# Altium PCB MB.PcbDoc
Units mil, origin at the board's own origin, x right, y up, seen from the top; angles counter-clockwise.
Board outline 5314.96 x 4527.56 mil, 2 copper layers (Top Layer, Bottom Layer); 58 components, 60 nets, 335 pads, 6 vias.
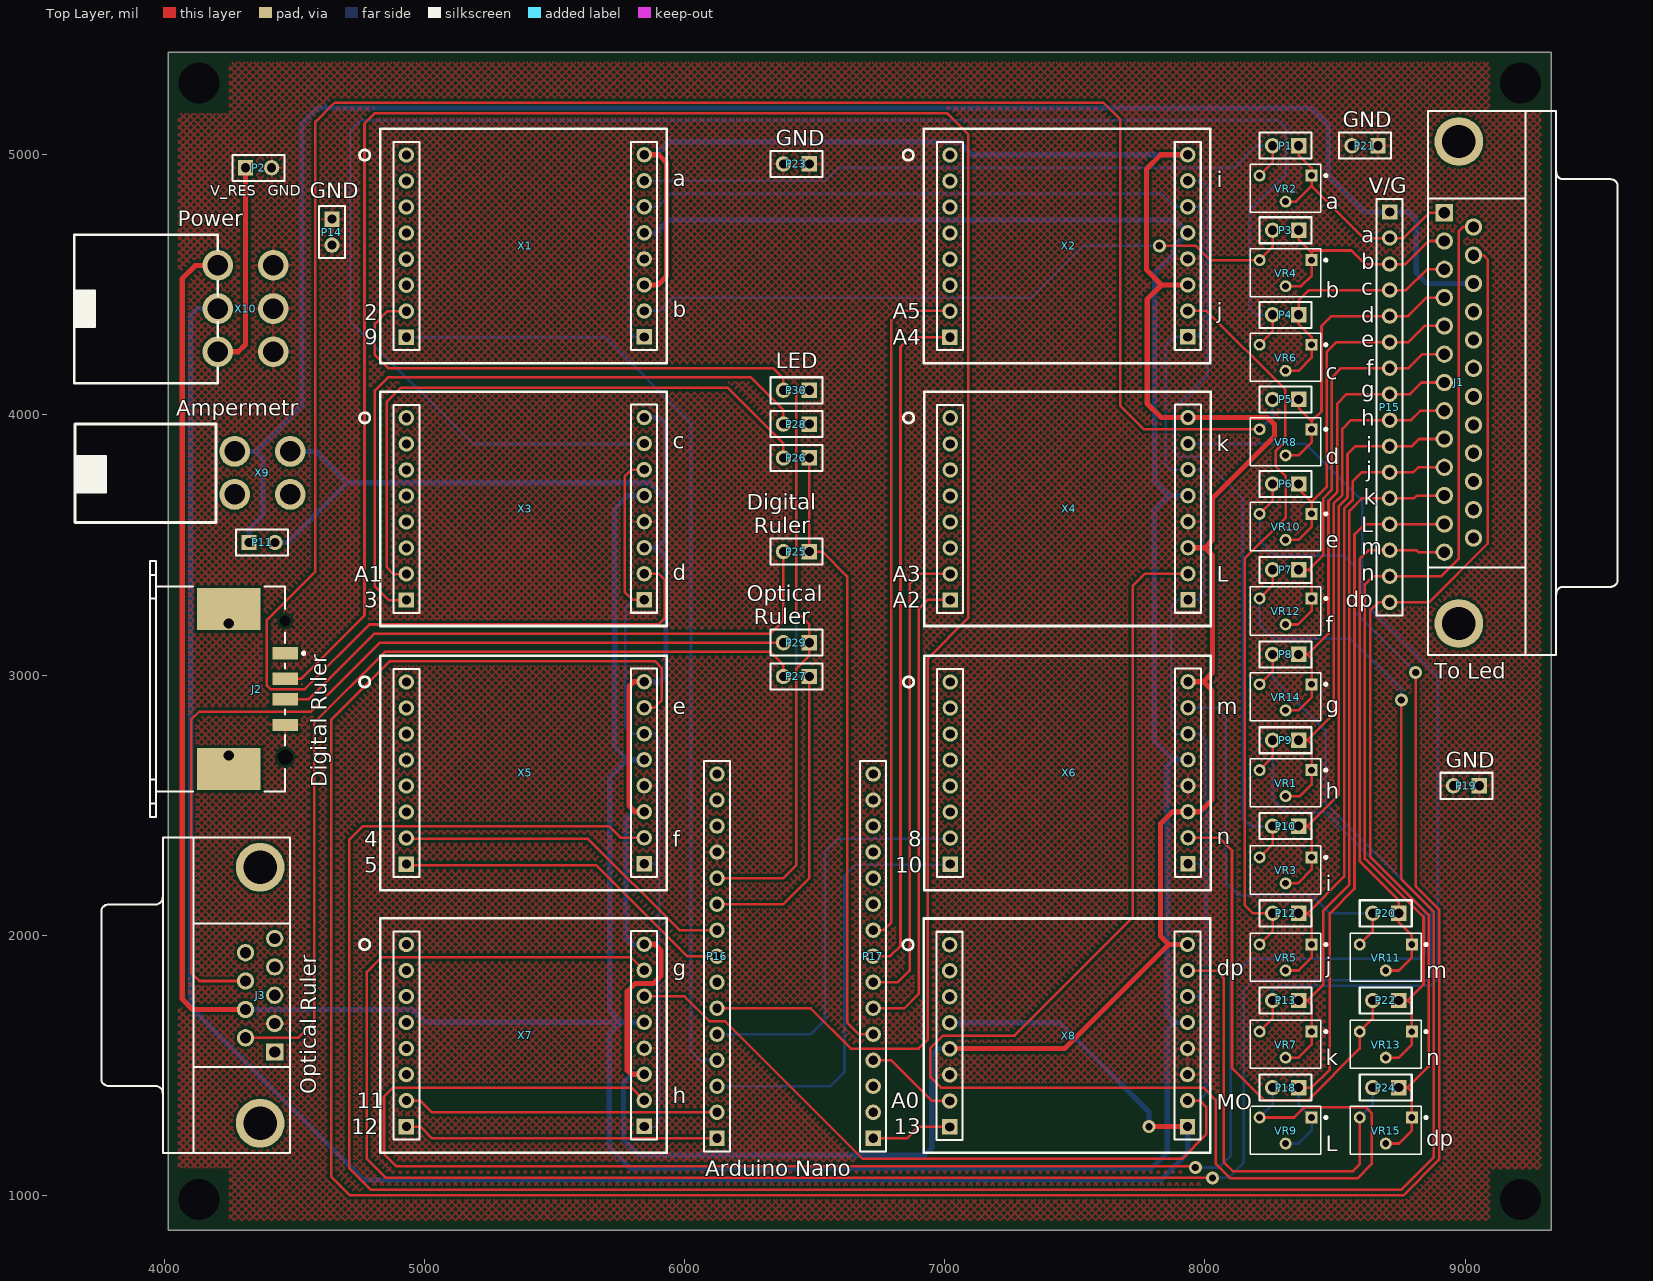
[diagram p0: Top Layer view]
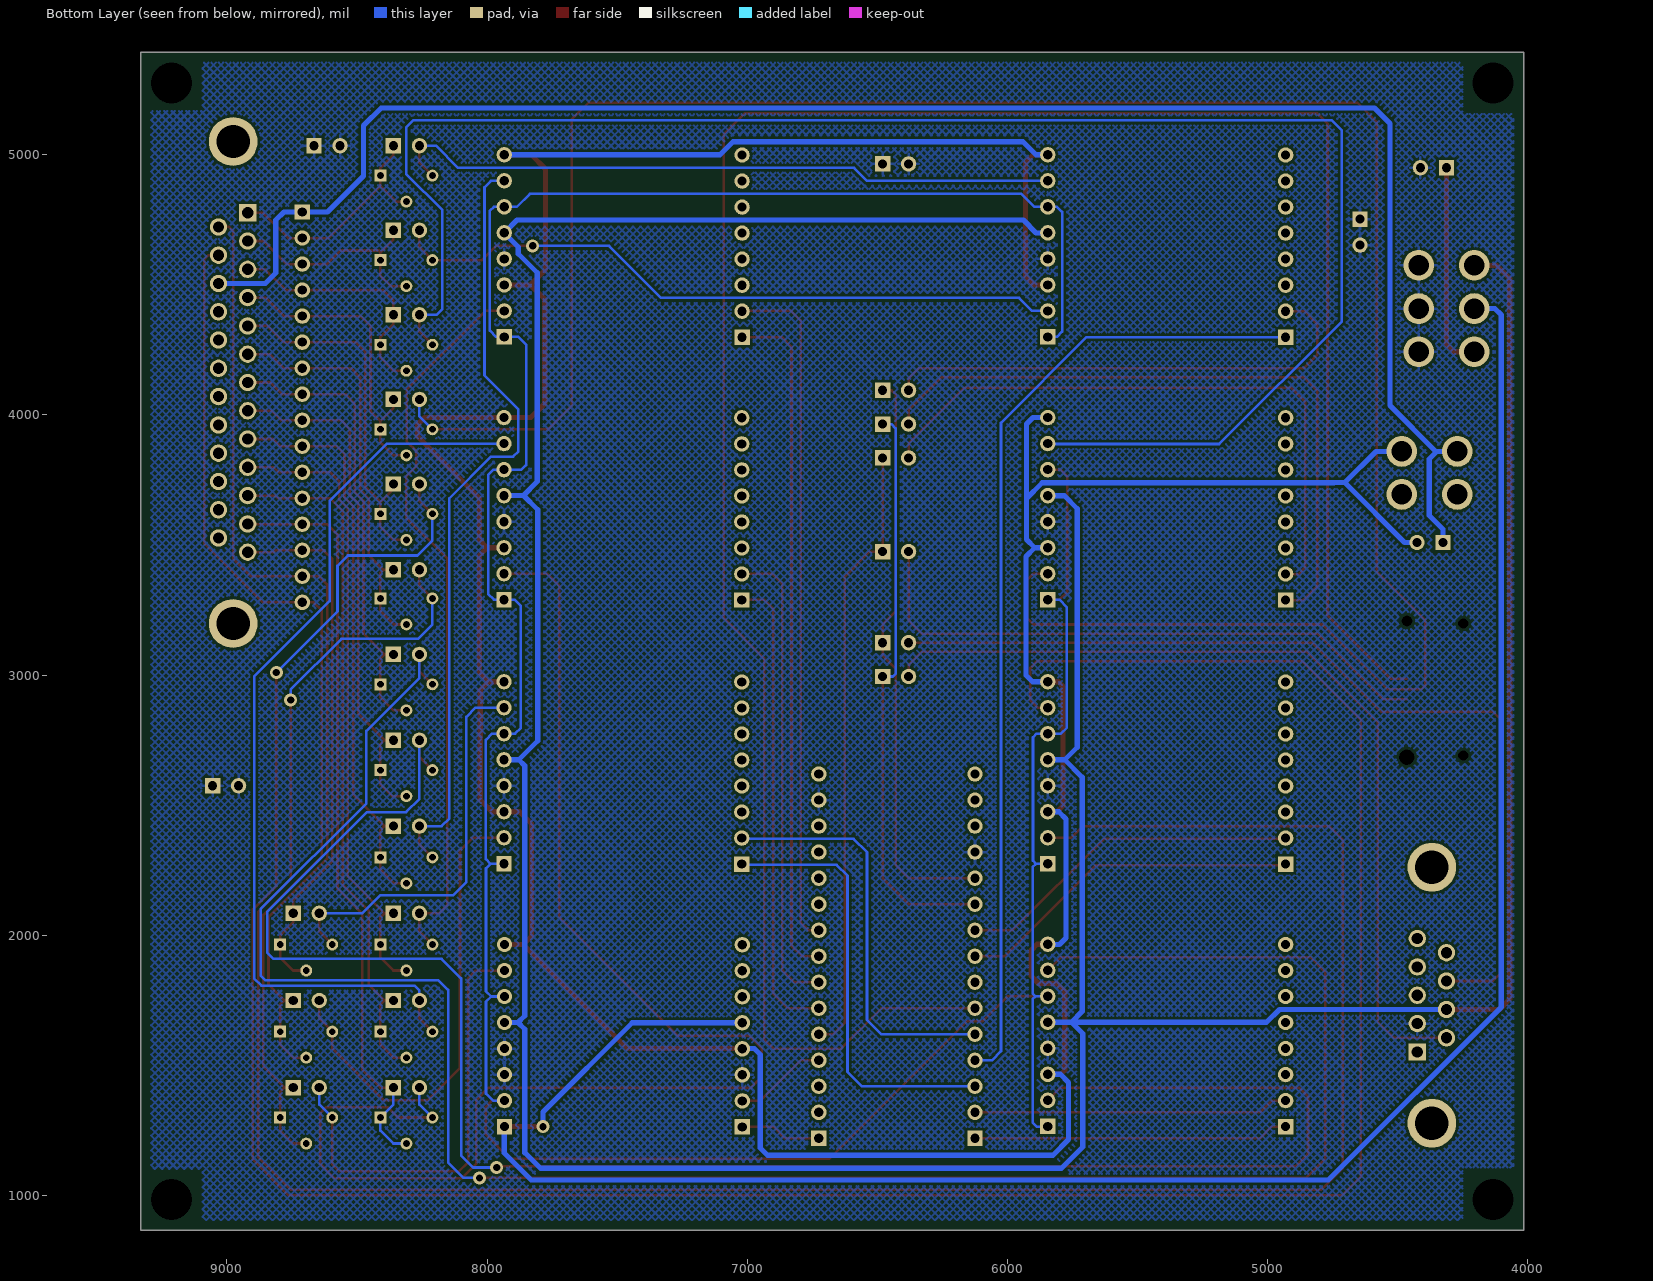
[diagram p1: Bottom Layer view, seen from below]

## Layer stack, top to bottom
Top Solder: solder mask 0.4, Solder Resist, Dk 3.5
Top Layer: signal copper 1.4
Dielectric 1: dielectric 12.6, FR-4, Dk 4.8
Bottom Layer: signal copper 1.4
Bottom Solder: solder mask 0.4, Solder Resist, Dk 3.5

## Board outline
4015.75,5393.7 9330.71,5393.7 9330.71,866.14 4015.75,866.14

## Design rules (kind name [scope] priority, off if disabled: settings)
Clearance [All] p1: gap=10 ignorepadtopadclearanceinfootprint=FALSE except(0: Arc-Hole Track-Hole SMDPad-Hole THPad-Hole Via-Hole Fill-Hole Poly-Hole Region-Hole Text-Hole)
PolygonConnect [All] p1: connectstyle=Relief reliefconductorwidth=10 reliefentries=4 polygonreliefangle="90 Angle" airgapwidth=10
RoutingVias [All] p1: holewidth=28 width=50 viastyle="Through Hole" minholewidth=28 minwidth=50 maxholewidth=28 maxwidth=50
SolderMaskExpansion [All] p1: expansion=4
Width [All] p1: maxlimit=20 minlimit=10 preferedwidth=10
30 further rules are at their usual default settings.

## Components (designator, comment, footprint, x,y, rotation, side; value= is the part's Value field where it differs from the comment)
J1 "D Connector 25" DSUB1.385-2H25A 9350,4125 r270 top
J2 "1-353576-1" 353576 3968.94,2946.7 r180 top
J3 "D Connector 9" DSUB1.385-2H9 3995,1770 r90 top
P1 "Header 2" HDR1X2 8360,5035 r180 top
P2 "Header 2" HDR1X2 4313,4950 r0 top
P3 "Header 2" HDR1X2 8360,4710 r180 top
P4 "Header 2" HDR1X2 8360,4385 r180 top
P5 "Header 2" HDR1X2 8360,4060 r180 top
P6 "GND" HDR1X2 8360,3735 r180 top
P7 "GND" HDR1X2 8360,3405 r180 top
P8 "GND" HDR1X2 8360,3080 r180 top
P9 "GND" HDR1X2 8360,2750 r180 top
P10 "Header 2" HDR1X2 8360,2420 r180 top
P11 "Header 2" HDR1X2 4326.18,3510 r0 top
P12 "Header 2" HDR1X2 8360,2085 r180 top
P13 "GND" HDR1X2 8360,1750 r180 top
P14 "GND" HDR1X2 4645,4752.85 r270 top
P15 "Header 16" HDR1X16 8710,4780 r270 top
P16 "Header 15" HDR1X15 6125,1220 r90 top
P17 "Header 15" HDR1X15 6725,1220 r90 top
P18 "GND" HDR1X2 8360,1415 r180 top
P19 "GND" HDR1X2 9055,2575 r180 top
P20 "GND" HDR1X2 8745,2085 r180 top
P21 "GND" HDR1X2 8665,5035 r180 top
P22 "GND" HDR1X2 8745,1750 r180 top
P23 "GND" HDR1X2 6480,4965 r180 top
P24 "GND" HDR1X2 8745,1415 r180 top
P25 "Digit_rul" HDR1X2 6480,3475 r180 top
P26 "Relay" HDR1X2 6480,3835 r180 top
P27 "Optic_rul" HDR1X2 6480,2995 r180 top
P28 "Relay" HDR1X2 6480,3965 r180 top
P29 "Optic_ruler" HDR1X2 6480,3125 r180 top
P30 "Relay" HDR1X2 6480,4094.98 r180 top
VR1 "RES 3266W" "RES 3266W" 8410,2635 r180 top
VR2 "RES 3266W" "RES 3266W" 8410,4920 r180 top
VR3 "RES 3266W" "RES 3266W" 8410,2300 r180 top
VR4 "RES 3266W" "RES 3266W" 8410,4595 r180 top
VR5 "RES 3266W" "RES 3266W" 8410,1965 r180 top
VR6 "RES 3266W" "RES 3266W" 8410,4270 r180 top
VR7 "RES 3266W" "RES 3266W" 8410,1630 r180 top
VR8 "RES 3266W" "RES 3266W" 8410,3945 r180 top
VR9 "RES 3266W" "RES 3266W" 8410,1300 r180 top
VR10 "RES 3266W" "RES 3266W" 8410,3620 r180 top
VR11 "RES 3266W" "RES 3266W" 8795,1965 r180 top
VR12 "RES 3266W" "RES 3266W" 8410,3295 r180 top
VR13 "RES 3266W" "RES 3266W" 8795,1630 r180 top
VR14 "RES 3266W" "RES 3266W" 8410,2965 r180 top
VR15 "RES 3266W" "RES 3266W" 8795,1300 r180 top
X1 "MEZ_RELAY" MEZ_RELAY 4931,4999 r0 top
X2 "MEZ_RELAY" MEZ_RELAY 7020,4999 r0 top
X3 "MEZ_RELAY" MEZ_RELAY 4931,3989 r0 top
X4 "MEZ_RELAY" MEZ_RELAY 7021,3989 r0 top
X5 "MEZ_RELAY" MEZ_RELAY 4931,2974 r0 top
X6 "MEZ_RELAY" MEZ_RELAY 7021,2974 r0 top
X7 "MEZ_RELAY" MEZ_RELAY 4931,1965 r0 top
X8 "MEZ_RELAY" MEZ_RELAY 7019,1964 r0 top
X9 "Ampermetr" AMP_VOLTMETER 4484.69,3860 r270 top
X10 "Power" POWER 4206.18,4575 r90 top

## Footprints (in the part's own frame and the unit in brackets; to place one, negate y for a bottom-side part, rotate by r counter-clockwise, add the part's x,y. Pads: shape width x height; smd on the part's side, far side on the other; paste and mask are expansions set on the pad)
353576 [mm] "Connector; USB1.1, Type A, SM; 4 Position; Right Angle"
  rect 2.5x1.2 smd: 1(-12.6,-3.5) 2(-12.6,-1) 3(-12.6,1) 4(-12.6,3.5)
  rect 6.2x4.1 smd: 5(-7.1,7.8) 6(-7.1,-7.8)
  round 0.7 hole 1 unplated: MH1(-7.1,6.496) MH2(-7.1,-6.404)
  round 1.2 hole 1.5 unplated: MH3(-12.6,6.65)
  round 0.8 hole 1.1 unplated: MH4(-12.6,-6.65)
  silkscreen extent -14.53,-12.5 0.6,12.5
AMP_VOLTMETER [mm] "AMP_VOLTMETER"
  round 3 hole 2: 1(0,0) 2(0,-5.423) 3(4.2,-5.423) 4(4.2,0)
  silkscreen extent -2.66,-21 6.94,-7.25
DSUB1.385-2H9 [mm] "Connector; D Subminiature; 9 Position; Right Angle; Pitch 1.385 mm"
  rect 1.69x1.69 hole 1.09: 1(-5.54,-10.92)
  round 1.69 hole 1.09: 2(-2.77,-10.92) 3(0,-10.92) 4(2.77,-10.92) 5(5.54,-10.92) 6(-4.155,-8.08) 8(1.385,-8.08) 9(4.155,-8.08)
  round 1.69 hole 1.09 mask+0.102: 7(-1.385,-8.08)
  round 4.76 hole 3.26: 10(-12.495,-9.5) 11(12.495,-9.5)
  silkscreen extent -15.4,-12.4 15.4,6
DSUB1.385-2H25A [mm] "Connector; D Subminiature; 25 Position; Right Angle; Pitch 1.385 mm"
  rect 1.69x1.69 hole 1.09: 1(-16.566,-10.92)
  round 1.69 hole 1.09: 2(-13.805,-10.92) 3(-11.044,-10.92) 4(-8.283,-10.92) 5(-5.522,-10.92) 6(-2.761,-10.92) 7(0,-10.92) 8(2.761,-10.92) 9(5.522,-10.92) 10(8.283,-10.92) 11(11.044,-10.92) 12(13.805,-10.92) 13(16.566,-10.92) 14(-15.185,-8.08) 15(-12.424,-8.08) 16(-9.663,-8.08) 17(-6.902,-8.08) 18(-4.141,-8.08) 19(-1.38,-8.08) 20(1.381,-8.08) 21(4.142,-8.08) 22(6.903,-8.08) 23(9.664,-8.08) 24(12.425,-8.08) 25(15.186,-8.08)
  round 4.76 hole 3.26: 26(-23.526,-9.5) 27(23.526,-9.5)
  silkscreen extent -26.5,-12.5 26.6,6
HDR1X2 [mm] "Connector; Header; 2 Position"
  rect 1.5x1.5 hole 0.9: 1(0,0)
  round 1.5 hole 0.9: 2(2.54,0)
  silkscreen extent -1.27,-1.27 3.81,1.27
HDR1X15 [mm] "Connector; Header; 15 Position"
  rect 1.5x1.5 hole 0.9: 1(0,0)
  round 1.5 hole 0.9: 2(2.54,0) 3(5.08,0) 4(7.62,0) 5(10.16,0) 6(12.7,0) 7(15.24,0) 8(17.78,0) 9(20.32,0) 10(22.86,0) 11(25.4,0) 12(27.94,0) 13(30.48,0) 14(33.02,0) 15(35.56,0)
  silkscreen extent -1.27,-1.27 36.83,1.27
HDR1X16 [mm] "Connector; Header; 16 Position"
  rect 1.5x1.5 hole 0.9: 1(0,0)
  round 1.5 hole 0.9: 2(2.54,0) 3(5.08,0) 4(7.62,0) 5(10.16,0) 6(12.7,0) 7(15.24,0) 8(17.78,0) 9(20.32,0) 10(22.86,0) 11(25.4,0) 12(27.94,0) 13(30.48,0) 14(33.02,0) 15(35.56,0) 16(38.1,0)
  silkscreen extent -1.27,-1.27 39.37,1.27
MEZ_RELAY [mm] "мезонин реле"
  round 1.5 hole 0.9: 1(0,0) 2(0,-2.54) 3(0,-5.08) 4(0,-7.62) 5(0,-10.16) 6(0,-12.7) 7(0,-15.24) 10(23.216,-15.215) 11(23.216,-12.675) 12(23.216,-10.135) 14(23.216,-5.055) 15(23.216,-2.515) 16(23.216,0.025)
  rect 1.5x1.5 hole 0.9: 8(0,-17.78) 9(23.216,-17.755)
  round 1.5 hole 0.9 mask+0.102: 13(23.216,-7.595)
  silkscreen extent -4.57,-20.32 25.43,2.57
POWER [mm] "POWER"
  round 3 hole 2 mask+0.102: 1(0,0)
  round 3 hole 2: 2(-4.217,0) 3(-8.435,0) 4(0,-5.422) 5(-4.217,-5.422) 6(-8.435,-5.422)
  silkscreen extent -11.5,0 3,14
"RES 3266W" [mm]
  rect 1.168x1.168 hole 0.66: 1(0,0)
  round 1.168 hole 0.66: 2(2.54,2.54) 3(5.08,0)
  silkscreen extent -1.49,-1.12 5.99,3.58, body extent -0.81,-1.02 5.9,3.48, height 8.77

## Part data
J1: "Receptacle Assembly, 25 Position, Right Angle", PackageDocument=U, DatasheetDocument=19-Mar-1999, Gender=Receptacle, LatestRevisionDate=17-Jul-2002, LatestRevisionNote="Re-released for DXP Platform.", Orientation="Right Angle", PackageReference=787202, Positions=25, Published=15-Jun-2001, Publisher="Altium Limited"
J2: "USB 1.1, Right Angle, SMT, A Type, Receptacle, 4 Position, White", PackageDocument=11-Apr-2003, ComponentLink1Description="Manufacturer Link", ComponentLink1URL=http://www.tycoelectronics.com/, ComponentLink2Description="Packaging Specification", ComponentLink2URL=http://ecommas.tycoelectronics.com/commerce/DocumentDelivery/DDEController?Action=showdoc&DocId=Customer+Drawing%7F353576%7FD%7Ftif%7FJapanese%7FJPN_CD_353576_D.tif, ContactMaterial="Copper Alloy", ContactPlating="Gold over Palladium Nickel", DatasheetDocument=11-Apr-2003, DrillSize="Corresponds to nominal value.", HousingMaterial=Thermoplastic, PackageReference=353576, PanelGround=Without, PCB_Layout="Complies with manufacturer's recommendation.", Published=15-Jul-2004, Publisher="Altium Limited"
J3: "Receptacle Assembly, 9 Position, Right Angle", PackageDocument=O, DatasheetDocument=1-Sep-1999, Gender=Receptacle, LatestRevisionDate=17-Jul-2002, LatestRevisionNote="Re-released for DXP Platform.", Orientation="Right Angle", PackageReference=788750, Positions=9, Published=15-Jun-2001, Publisher="Altium Limited"
P1 P2 P3 P4 P5 P10 P11 P12: "Header, 2-Pin", LatestRevisionDate=17-Jul-2002, LatestRevisionNote="Re-released for DXP Platform.", Publisher="Altium Limited"
P6 P7 P8 P9 P13 P14 P18 P19 P20 P21 P22 P23 P24 P25 P26 P27 P28 P29 P30: library part "Header 2", "Header, 2-Pin", LatestRevisionDate=17-Jul-2002, LatestRevisionNote="Re-released for DXP Platform.", Publisher="Altium Limited"
P15: "Header, 16-Pin", LatestRevisionDate=17-Jul-2002, LatestRevisionNote="Re-released for DXP Platform.", Publisher="Altium Limited"
P16 P17: "Header, 15-Pin", LatestRevisionDate=17-Jul-2002, LatestRevisionNote="Re-released for DXP Platform.", Publisher="Altium Limited"
X9: library part AMP_VOLTMETR
X10: library part POWER

## Free pads (board coordinates)
  round 0 hole 157.48: 7(4133.86,984.25) 7(4133.86,5275.59) 7(9212.6,984.25) 7(9212.6,5275.59)

## Via types
v1: diameter 50, hole 28, Top Layer to Bottom Layer, 6 vias

## Nets (pads, with @x,y where several pads share a name; then routed paths per layer and width w, separated by ;. In a path a pad name is that pad's centre, name@x,y a point inside that pad or via, vN(x,y) a via of type N, cw(c..) or ccw(c..) an arc to the next point about the centre after c; other vN are vias at no path point)
a: P1.2 VR2.3 X1.15 | length 2606.6
  Top Layer w10: VR2.3 8260,4970 P1.2
  Bottom Layer w10: X1.15 6540,4900 6590,4950 8112,4950 8197,5035 P1.2
A0: P17.4 X8.7 | length 359.2
  Top Layer w10: P17.4 6795,1520 6950,1365 X8.7@7020,1365
A1: P17.5 P25.1 P26.1 | length 2378
  Top Layer w10: P26.1 P25.1 6530,3475 6625,3380 6625,1665 6670,1620 P17.5
A1_relay: P26.2 X3.7 | length 2414.2
  Top Layer w10: X3.7@4931,3387.67 4882.33,3387.67 4855,3415 4855,4050 4910,4105 6165,4105 6380,3890 P26.2
A1_ruler: J2.3 P25.2 | length 2305.4
  Top Layer w10: J2.3 4555.33,2907.33 4808,3160 6330,3160 6380,3210 P25.2
A2: P17.6 X4.8 | length 1812.3
  Top Layer w10: P17.6 6845,1720 6900,1775 6900,3255 6935,3290 X4.8@7020,3290
A3: P17.7 X4.7 | length 1815.2
  Top Layer w10: P17.7 6820,1820 6865,1865 6865,3350 6905,3390 X4.7@7020,3390
A4: P17.8 X2.8 | length 2628.9
  Top Layer w10: P17.8 6790,1920 6830,1960 6830,4262 6867,4299 X2.8
A5: P17.9 X2.7 | length 2634.8
  Top Layer w10: P17.9 6765,2020 6795,2050 6795,4363 6832,4400 X2.7@7019,4400
a_0: J1.1 P1.1 P15.2 VR2.1 VR2.2 | length 933.7
  Top Layer w10: VR2.2 8350,4820 8410,4880 ; P1.1 8360,5000 8410,4950 VR2.1 8410,4880 ; J1.1 8861.2,4777.2 8764,4680 P15.2 8610,4680 8410,4880
b: P3.2 VR4.3 X1.10 | length 2627
  Top Layer w10: v1(7825,4650) 7965,4650 8020,4595 VR4.3 8260,4645 P3.2
  Bottom Layer w10: X1.10 5905,4400 5955,4450 7331,4450 7531,4650 v1(7825,4650)
b_0: J1.2 P3.1 P15.3 VR4.1 VR4.2 | length 899.7
  Top Layer w10: VR4.2 8370,4495 8410,4535 VR4.1 8410,4625 ; P3.1 8360,4675 8410,4625 ; J1.2@8908.58,4680 J1.2 8858.5,4668.5 8770,4580 P15.3 8615,4580 8563,4632 8417,4632 8410,4625
c: P4.2 VR6.3 X3.15 | length 6669.1
  Top Layer w10: VR6.3 8260,4320 P4.2
  Bottom Layer w10: X3.15@5845,3888.67 5186.33,3888.67 4715,4360 4715,5094 4753,5132 8284,5132 8310,5106 8310,4925 8172.01,4787.01 8172.01,4407.99 8195,4385 P4.2
c_0: J1.3 P4.1 P15.4 VR6.1 VR6.2 | length 999.4
  Top Layer w10: VR6.2 8359,4170 8410,4221 VR6.1 8410,4300 ; 8409.55,4299.55 8360,4349.09 P4.1 8360,4440 8400,4480 P15.4 8773.55,4480 8853.35,4559.8 J1.3 J1.3@8899.88,4580
d: P5.2 VR8.3 X3.10 | length 9087.3
  Top Layer w10: X3.10 5900,3390 5925,3365 5925,3220 5900,3195 4789,3195 4539.96,2945.96 4409.04,2945.96 4395,2960 4395,3212 4581,3398 4581,5126 4655,5200 7610,5200 7675,5135 7675,4035 7765,3945 VR8.3
  Bottom Layer w10: VR8.3 8260,3995 P5.2
D2: P16.11 P29.1 P30.1 | length 2233.5
  Top Layer w10: P16.11 6380,2220 6430,2270 6430,3025.27 6447.6,3042.87 6447.87,3042.87 6480,3075 P29.1 6480,3195 6430,3245 6430,4080 6444.98,4094.98 P30.1
D2_relay: P30.2 X1.7 | length 1913
  Top Layer w10: X1.7 4859,4399 4810,4350 4810,4231 4861,4180 6340,4180 6380,4140 P30.2
D2_ruler: J3.8 P29.2 | length 3593.8
  Top Layer w10: J3.8 4135.47,1824.53 4104,1856 4104,2829 4135,2860 4564,2860 4829,3125 P29.2
D3: P16.10 P27.1 P28.1 | length 2226.2
  Top Layer w10: P16.10 6380,2120 6480,2220 P27.1
  Bottom Layer w10: P27.1 6440,2995 6430,3005 6430,3949 6446,3965 P28.1
D3_relay: P28.2 X3.8 | length 2594.6
  Top Layer w10: X3.8@4931,3287.67 4863.33,3287.67 4810,3341 4810,4095 4860,4145 6255,4145 6380,4020 P28.2
D3_ruler: J3.6 P27.2 | length 3420.8
  Top Layer w10: J3.6 4515.42,1606.42 4577,1668 4577,2818 4849,3090 5990,3090 6330,3090 6380,3040 P27.2
D4: P16.9 X5.7 | length 1339.5
  Top Layer w10: X5.7@4931,2371.33 5628.67,2371.33 5980,2020 P16.9
D5: P16.8 X5.8 | length 1337.6
  Top Layer w10: X5.8@4932.33,2270 5660,2270 6010,1920 P16.8
D7: J2.2 P16.6 | length 9098.1
  Top Layer w10: J2.2 4526.07,2986.07 4770,3230 4770,5120 4810,5160 7009,5160 7090,5079 7090,3220 6935,3065 6935,1600 6900,1565 6640,1565 6485,1720 P16.6
D8: P16.5 X6.7 | length 1584
  Bottom Layer w10: P16.5 6485,1620 6540,1675 6540,2320 6591.33,2371.33 X6.7@7020,2371.33
D9: P16.4 X1.8 | length 3759.8
  Bottom Layer w10: X1.8 5696,4299 6025,3970 6025,1555 6060,1520 P16.4
D10: P16.3 X6.8 | length 1689.9
  Bottom Layer w10: P16.3 6560,1420 6615,1475 6615,2230 6656.33,2271.33 X6.8@7020,2271.33
D11: P16.2 X7.7 | length 1212.6
  Top Layer w10: X7.7 4984,1365 5029,1320 P16.2
D12: P16.1 X7.8 | length 1212.6
  Top Layer w10: X7.8 4985,1265 5030,1220 P16.1
D13: P17.1 X8.8 | length 313.6
  Top Layer w10: P17.1 6855,1220 6900,1265 X8.8@7020,1265
d_0: J1.4 P5.1 P15.5 VR8.1 VR8.2 | length 1205.4
  Top Layer w10: VR8.2 8360,3845 8410,3895 VR8.1 8410,3976 ; P5.1 8360,4026 8410,3976 ; J1.4 8852.1,4451.1 8781,4380 P15.5 8486,4380 8447.99,4341.99 8447.99,4013.99 8410,3976
dp: P24.2 VR15.3 X8.15 | length 1721.7
  Top Layer w10: X8.15@7933,1864.33 8043.67,1864.33 8073,1835 8073,1128 8107,1094 8569,1094 8595,1120 VR15.3
  Bottom Layer w10: VR15.3 8645,1350 P24.2
dp_0: J1.15 P15.16 P24.1 VR15.1 VR15.2 | length 3998.2
  Top Layer w10: VR15.2 8745,1200 8795,1250 VR15.1 8795,1399 8779,1415 ; P24.1 8779,1415 ; J1.15 9069.85,4614.15 9087,4597 9087,3506 8861,3280 P15.16 8667,3280 8635,3248 8635,2303.55 8860,2078.55 8860,1795 8860,1496 8779,1415
e: P6.2 VR10.3 X5.15 | length 10736.9
  Top Layer w10: X5.15 5884,2875 5912,2903 5912,3028 5886,3054 4869,3054 4642,2827 4642,1073 4714,1001 8763,1001 8900,1138 8900,2100 8810,2190 v1(8810,3010) ; VR10.3 8260,3670 P6.2
  Bottom Layer w10: VR10.3 8210,3517.99 8267.99,3460 8535,3460 8575,3420 8575,3245 v1(8810,3010)
e_0: J1.5 P6.1 P15.6 VR10.1 VR10.2 | length 1401.1
  Top Layer w10: VR10.2 8360,3520 8410,3570 VR10.1 8410,3665 ; P6.1 8360,3715 8410,3665 ; J1.5 8844.4,4342.4 8782,4280 P15.6 8506,4280 8468,4242 8468,3723 8410,3665
f: P7.2 VR12.3 X5.10 | length 9423.4
  Top Layer w10: X5.10 5755,2375 5710,2420 4765,2420 4711,2366 4711,1106 4795,1022 8753,1022 8880,1149 8880,2090 8755,2215 v1(8755,2905) ; VR12.3 8260,3345 P7.2 P7.2@8260,3410
  Bottom Layer w10: VR12.3 8210,3195 8265,3140 8560,3140 8755,2945 v1(8755,2905)
f_0: J1.6 P7.1 P15.7 VR12.1 VR12.2 | length 1568.6
  Top Layer w10: VR12.2 8357.74,3195 8410,3247.26 VR12.1 8410,3394 8399,3405 ; P7.1 8399,3405 ; J1.6 8836.7,4233.7 8783,4180 P15.7 8523,4180 8488,4145 8488,3713 8455,3680 8455,3461 8399,3405
g: P8.2 VR14.3 X7.15 | length 8283.2
  Top Layer w10: X7.15 5795,1916 4835,1916 4779,1860 4779,1141 4852,1068 v1(8029,1068) ; VR14.3 8260,3015 P8.2
  Bottom Layer w10: v1(8029,1068) 8090,1068 8150,1128 8150,1790 8187,1827 8852,1827 8870,1845 8870,2101 8464,2507 8464,2786 8260,2990 P8.2
g_0: J1.7 P8.1 P15.8 VR14.1 VR14.2 | length 1782.8
  Top Layer w10: VR14.2 8360,2865 8410,2915 VR14.1 8410,3065 8395,3080 ; P8.1 8395,3080 ; J1.7 8833,4125 8788,4080 P15.8 8545,4080 8508,4043 8508,3703 8475,3670 8475,3160 8395,3080
GND: J2.4 J3.2 P2.2 P14.1 P14.2 P16.12 P17.14 P19.1 P19.2 P21.1 P21.2 P23.1 P23.2 X1.12 X2.12 X3.12 X4.12 X5.12 X6.12 X7.12 X8.6 X8.11 X8.12 X10.4 X10.5 X10.6
h: P9.2 VR1.3 X7.10 | length 7298.7
  Top Layer w10: X7.10 5796,1415 4880,1415 4845,1380 4845,1160 4893,1112 7959,1112 v1(7963,1108) ; VR1.3 8260,2685 P9.2
  Bottom Layer w10: v1(7963,1108) 8054,1108 8100,1154 8100,1835 8175,1910 8820,1910 8845,1935 8845,2090 8461,2474 8311,2474 8260,2525 P9.2
h_0: J1.8 P9.1 P15.9 VR1.1 VR1.2 | length 2002.7
  Top Layer w10: VR1.2 8365,2535 8410,2580 VR1.1 8410,2735 8395,2750 ; P9.1 8395,2750 ; J1.8 8828.3,4016.3 8792,3980 P15.9 8561,3980 8528,3947 8528,3693 8495,3660 8495,2850 8395,2750
i: P10.2 VR3.3 X2.15 | length 2992.9
  Top Layer w10: VR3.3 8260,2350 P10.2
  Bottom Layer w10: X2.15 7985,4900 8010,4875 8010,4152 7880,4022 7880,3860 7900,3840 7985,3840 8145,3680 8145,2450 8175,2420 P10.2
i_0: J1.9 P10.1 P15.10 VR3.1 VR3.2 | length 2219.2
  Top Layer w10: VR3.2 8356.89,2200 8410,2253.11 VR3.1 8410,2404 8394,2420 ; P10.1 8394,2420 ; J1.9 8823.6,3907.6 8796,3880 P15.10 8578,3880 8548,3850 8548,3683 8515,3650 8515,2541 8394,2420
j: P12.2 VR5.3 X2.10 | length 2837.3
  Top Layer w10: X2.10 8007,4400 8308,4099 8308,3896.73 8272.01,3860.74 8272.01,3802.99 8310,3765 8310,3605 8153,3448 8153,2117 8185,2085 P12.2 8260,2015 VR5.3
j_0: J1.10 P12.1 P15.11 VR5.1 VR5.2 | length 2437.8
  Top Layer w10: VR5.2 8360,1865 8410,1915 VR5.1 8410,2069 8394,2085 ; P12.1 8394,2085 ; J1.10 8819.9,3798.9 8801,3780 P15.11 8603,3780 8568,3745 8568,3673 8535,3640 8535,2226 8394,2085
k: P13.2 VR7.3 X4.15 | length 3549.4
  Top Layer w10: VR7.3 8260,1680 P13.2
  Bottom Layer w10: X4.15 8385,3890 8605,3670 8605,3285 8895,2995 8895,1835 8867,1807 8279,1807 8260,1788 P13.2
k_0: J1.11 P13.1 P15.12 VR7.1 VR7.2 | length 2669
  Top Layer w10: VR7.2 8360,1530 8410,1580 VR7.1 8410,1734 8394,1750 ; P13.1 8394,1750 ; J1.11 8814.2,3690.2 8804,3680 P15.12 8603.28,3680 8555,3631.72 8555,2195 8455,2095 8455,1811 8394,1750
l: P18.2 VR9.3 X4.10 | length 5414.3
  Top Layer w10: X4.10 7770,3390 7722,3342 7722,2069 7268,1615 6993.58,1615 6945,1566.42 6945,1455 6985,1415 7994,1415 8041,1368 8041,1124 8099,1066 8586,1066 8641,1121 8641,1317 8617.84,1340.16 8382.96,1340.16 8342.8,1300 VR9.3
  Bottom Layer w10: VR9.3 8260,1350 P18.2
l_0: J1.12 P15.13 P18.1 VR9.1 VR9.2 | length 2912.6
  Top Layer w10: P18.1 8410,1415 8480,1485 8480,2085 8575,2180 8575,3541 8614,3580 P15.13 8918.58,3580 J1.12
  Bottom Layer w10: VR9.2 8360,1200 8410,1250 VR9.1 8360,1350 P18.1
m: P20.2 VR11.3 X6.15 | length 1549.9
  Top Layer w10: VR11.3 8645,2015 P20.2
  Bottom Layer w10: X6.15 8045,2875 8080,2840 8080,2205 8130,2155 8410,2155 8480,2085 P20.2
m_0: J1.13 P15.14 P20.1 VR11.1 VR11.2 | length 2077.3
  Top Layer w10: VR11.2 8745,1865 8795,1915 VR11.1 8795,2000 8745,2050 P20.1 8745,2135 8595,2285 8595,3447 8628,3480 P15.14 8813,3480 8820.2,3472.8 J1.13
MASTER_OUT: X1.9 X1.14 X2.9 X2.14 X3.9 X3.14 X4.9 X4.14 X5.9 X5.14 X6.9 X6.14 X7.9 X7.14 X8.10 X8.14 | length 12436.6
  Top Layer w10: X7.14 6000,1766 6096,1670 6156,1670 6685,1141 7911,1141 8005,1235 8005,1341 7981,1365 X8.10 ; X3.9 5800,3290 5770,3320 5770,3763 5797,3790 X3.14
  Bottom Layer w10: X7.14 5893,1766 ; X5.9 5890,2275 ; X3.9 5801,3290 5772,3261 5772,2798 5795,2775 X5.14 5888,2775 5902,2761 5902,2287 5890,2275 ; X1.9 5810,4300 5790,4320 5790,4780 5810,4800 X1.14 5897,4800 5947,4850 7836,4850 7886,4800 X2.14 7974,4800 7989,4785 7989,4324 7965,4300 X2.9 7880,4300 7850,4270 7850,3808 7868,3790 X4.14 7976,3790 7996,3770 7996,3312 7974,3290 X4.9 7895,3290 7870,3265 7870,2797 7892,2775 X6.14 7981,2775 8005,2751 8005,2293 7987,2275 ; X7.9@5846,1265 5888,1265 5903,1280 5903,1756 5893,1766 ; X8.10 7977,1365 8004,1392 8004,1745 7984,1765 ; X8.14 7984,1765 ; X6.9 7987,2275 ; 5890,2275 5903,2262 5903,1776 5893,1766 ; 7984,1765 8004,1785 8004,2258 7987,2275
n: P22.2 VR13.3 X6.10 | length 1855.8
  Top Layer w10: X6.10 8056,2375 8104,2327 8104,1491 8229,1366 8396,1366 8595,1565 VR13.3 8645,1680 P22.2
n_0: J1.14 P15.15 P22.1 VR13.1 VR13.2 | length 3772.2
  Top Layer w10: VR13.2 8745,1530 8795,1580 VR13.1 8795,1734 8779,1750 ; P22.1 8779,1750 ; J1.14 8991.85,4722.85 8975.98,4706.98 8975.98,3447.98 8908,3380 P15.15 8646.1,3380 8615,3348.9 8615,2295.27 8840,2070.27 8840,1811 8779,1750
V/G_FROM_A: P11.2 X1.11 X1.16 X2.11 X2.16 X3.11 X3.16 X4.11 X4.16 X5.11 X5.16 X6.11 X6.16 X7.11 X7.16 X8.5 X8.16 X9.1 | length 15034.7
  Top Layer w10: X8.16@7930.33,1967.67 X8.16
  Top Layer w20: X7.11 5796,1466 5780,1482 5780,1785 5810.53,1815.53 5880.53,1815.53 5910,1845 5910,1942 5886,1966 X7.16 ; X5.11 5810,2475 5787,2498 5787,2957 5805,2975 X5.16 ; X1.11 5898,4500 5931,4533 5931,4970 5901,5000 X1.16 ; X8.5@7020,1565 7461,1565 7861,1965 ; X8.16 7861,1965 ; X2.11 7833,4500 ; X2.16 7830,5000 7775,4945 7775,4558 7833,4500 ; X6.16 7994,2975 ; X4.11 8000,3490 ; 7833,4500 7778,4445 7778,4044 7832,3990 X4.16 8241,3990 8267,3964 8267,3918 8029,3680 8029,3519 8000,3490 ; 7861,1965 7829,1997 7829,2429 7875,2475 X6.11 7981,2475 8026,2520 8026,2943 7994,2975 ; 7994,2975 8029,3010 8029,3461 8000,3490
  Bottom Layer w20: P11.2 4474,3510 4704,3740 ; X9.1 4584,3860 4704,3740 ; X7.16@5844,1965 5800,1965 5775,1990 5775,2447 5803,2475 X5.11 ; X7.11 5796,1466 5765,1435 5765,1215 5825,1155 6922,1155 6950,1183 6950,1542 6973,1565 X8.5@7020,1565 ; X5.16 5904,2975 5929,3000 5929,3456 5895,3490 ; X3.11 5895,3490 ; X3.16 5902,3990 5927,3965 5927,3679 ; X1.16 5890,5000 5940,5050 7055,5050 7105,5000 X2.16 ; 4704,3740 4745,3740 4745.47,3739.53 4910.43,3739.53 4910.48,3739.47 5790.53,3739.47 5790.58,3739.53 5866.47,3739.53 5927,3679 ; 5895,3490 5927,3522 5927,3679
V/G_TO_A: J1.16 P11.1 P15.1 X9.2 | length 6834.3
  Bottom Layer w20: X9.2 4350,3860 ; P11.1 4326.18,3561.18 4379,3614 4379,3831 4352,3858 4530,4036 4530,5120 4590,5180 8407,5180 8475,5112 8475,4918 8613,4780 P15.1 8781,4780 8812,4749 8812,4546 8852.55,4505.45 J1.16
V_LED: X8.4 X8.9 X10.2 | length 8137.1
  Top Layer w20: v1(7785,1265) X8.9
  Bottom Layer w20: X10.2 4127,4408.96 4102,4383.96 4102,1725 4767,1060 4949,1060 7830,1060 7934,1164 X8.9@7934,1265 ; X8.4 7442,1664 7785,1321 v1(7785,1265)
V_MB: J3.7 X1.13 X2.13 X3.13 X4.13 X5.13 X6.13 X7.13 X8.13 X10.1 | length 15680.2
  Top Layer w20: X10.1 4120,4575 4070,4525 4070,1755 4109.53,1715.47 J3.7
  Bottom Layer w20: J3.7 4954.53,1715.47 5004,1666 5754,1666 ; X3.13@5843.67,3690 5782,3690 5732,3640 5732,2723 5780,2675 ; X7.13 5754,1666 ; X5.13 5780,2675 ; X1.13 5890,4700 5939,4749 7885,4749 X2.13 7880,4646 7880,4620 7807,4547 7807,3744 7860,3691 ; 7855,2653 7855,1691 7881,1665 ; 7856,2653 7878,2675 ; X8.13 7881,1665 ; X4.13@7934,3691 7860,3691 ; X6.13 7878,2675 ; 5754,1666 5713,1707 5713,2608 5780,2675 ; 5754,1666 5711,1623 5711,1187 5793,1105 7795,1105 7855,1165 7855,1639 7881,1665 ; 7860,3691 7805,3636 7805,2748 7878,2675
V_RESERVE: P2.1 X10.3 | length 797.5
  Top Layer w20: X10.3 4284.91,4242.91 4313,4271 P2.1
pads on no net: J1.17 J1.18 J1.19 J1.20 J1.21 J1.22 J1.23 J1.24 J1.25 J1.26 J1.27 J2.1 J2.5 J2.6 J2.MH1 J2.MH2 J2.MH3 J2.MH4 J3.1 J3.3 J3.4 J3.5 J3.9 J3.10 J3.11 P16.7 P16.13 P16.14 P16.15 P17.2 P17.3 P17.10 P17.11 P17.12 P17.13 P17.15 X1.1 X1.2 X1.3 X1.4 X1.5 X1.6 X2.1 X2.2 X2.3 X2.4 X2.5 X2.6 X3.1 X3.2 X3.3 X3.4 X3.5 X3.6 X4.1 X4.2 X4.3 X4.4 X4.5 X4.6 X5.1 X5.2 X5.3 X5.4 X5.5 X5.6 X6.1 X6.2 X6.3 X6.4 X6.5 X6.6 X7.1 X7.2 X7.3 X7.4 X7.5 X7.6 X8.1 X8.2 X8.3 X9.3 X9.4

## Polygon pours and split planes (outlines as drawn)
GND on Bottom Layer "NONET_L02_P-001" (hatched 45Degree grid 20 track 8, remove dead copper, pour order 4): 4055.12,5354.33 9291.34,5354.33 9291.34,905.51 4055.12,905.51
no net on Bottom Layer "NONET_L02_P-001" (solid, remove dead copper, pour order 2): 4015.75,5354.33
no net on Bottom Layer "NONET_L02_P-001" (solid, remove dead copper, pour order 0): 4015.75,5393.7
GND on Top Layer "NONET_L02_P-001" (hatched 45Degree grid 20 track 8, remove dead copper, pour order 8): 4055.12,5354.33 9291.34,5354.33 9291.34,905.51 4055.12,905.51
no net on Top Layer "NONET_L02_P-001" (solid, remove dead copper, pour order 6): 4094.49,5354.33

## Other copper
Top Layer:
  pour cut-out: 9094.49,1102.36 9330.71,1102.36 9330.71,866.14 9094.49,866.14
  pour cut-out: 4015.75,866.14 4015.75,1108 4251.97,1108 4251.97,866.14
  pour cut-out: 9094.49,5393.7 9330.71,5393.7 9330.71,5168.15 9094.49,5168.15
  pour cut-out: 4015.75,5393.7 4251.97,5393.7 4251.97,5157.07 4251.56,5157.48 4015.75,5157.48
  pour cut-out: 4015.75,5393.7
Bottom Layer:
  pour cut-out: 4015.75,866.14 4015.75,1108 4251.97,1108 4251.97,866.14
  pour cut-out: 9330.71,866.14 9330.71,1102.36 9094.49,1102.36 9094.49,866.14
  pour cut-out: 9330.71,5393.7 9094.49,5393.7 9094.49,5168.15 9330.71,5168.15
  pour cut-out: 4015.75,5393.7 4251.97,5393.7 4251.97,5157.48 4015.75,5157.48

## Silkscreen, mask and mechanical layers (free items; w line width, h text height)
Top Overlay:
  text "GND" at 8530,5105 h60
  text "GND" at 6350,5035 h60
  text "a" at 5955,4880 h60
  text "i" at 8045,4875 h60
  text "V/G" at 8630,4852 h60
  text "V_RES" at 4178,4842 h40
  text "GND" at 4399,4842 h40
  text "GND" at 4560,4832.85 h60
  text "a" at 8465,4790 h60
  text "a" at 8601.01,4662 h60
  text "b" at 8601.01,4561 h60
  text "c" at 8601.01,4461 h60
  text "b" at 8465,4450 h60
  text "b" at 5955,4375 h60
  text "A5" at 6800,4370 h60
  text "j" at 8045,4369.99 h60
  text "2" at 4770,4365 h60
  text "d" at 8601.01,4355 h60
  text "9" at 4770,4270 h60
  text "A4" at 6800,4270 h60
  text "e" at 8601.01,4260 h60
  text "LED" at 6350,4180 h60
  text "f" at 8621,4150 h60
  text "c" at 8465,4135 h60
  text "g" at 8601.01,4068 h60
  text "h" at 8601.01,3959 h60
  text "c" at 5955,3870 h60
  text "k" at 8045,3860 h60
  text "i" at 8621,3854 h60
  text "d" at 8465,3810 h60
  text "j" at 8621,3760 h60
  text "k" at 8611,3655 h60
  text "L" at 8601.01,3550 h60
  text "Digital /  Ruler" at 6240,3545 h60
  text "e" at 8465,3490 h60
  text "m" at 8601.01,3462 h60
  text "d" at 5955,3365 h60
  text "n" at 8601.01,3362 h60
  text "A1" at 4730,3360 h60
  text "A3" at 6800,3360 h60
  text "L" at 8045,3360 h60
  text "dp" at 8541.03,3260.99 h60
  text "3" at 4770,3260 h60
  text "A2" at 6800,3260 h60
  text "Optical /  Ruler" at 6240,3195 h60
  text "f" at 8465,3165 h60
  text "To Led" at 8882,2987 h60
  text "g" at 8465,2854.99 h60
  text "e" at 5955,2850 h60
  text "m" at 8045,2850 h60
  text "Digital Ruler" at 4625,2570 h60 r90
  text "h" at 8465,2524.99 h60
  text "n" at 8045,2350 h60
  text "4" at 4770,2340 h60
  text "f" at 5955,2340 h60
  text "8" at 6860,2340 h60
  text "5" at 4770,2240 h60
  text "10" at 6810,2240 h60
  text "i" at 8465,2170 h60
  text "j" at 8465,1854.99 h60
  text "g" at 5955,1844.99 h60
  text "dp" at 8045,1844.99 h60
  text "m" at 8850,1835 h60
  text "k" at 8465,1500 h60
  text "n" at 8850,1500 h60
  text "Optical Ruler" at 4585,1390 h60 r90
  text "h" at 5955,1354.99 h60
  text "11" at 4740,1335 h60
  text "A0" at 6795,1335 h60
  text "MO" at 8045,1330 h60
  text "12" at 4720,1235 h60
  text "13" at 6805,1235 h60
  text "dp" at 8850,1189.99 h60
  text "L" at 8465,1170 h60
  text "Arduino Nano" at 6080,1075 h60
Mechanical 1:
  the board outline again, w10